# Altium PCB STM32H7.PcbDoc
Units mm, origin at the board's own origin, x right, y up, seen from the top; angles counter-clockwise.
Board outline 71.12 x 61.47 mm, 2 copper layers (Top Layer, Bottom Layer); 67 components, 53 nets, 304 pads, 82 vias.
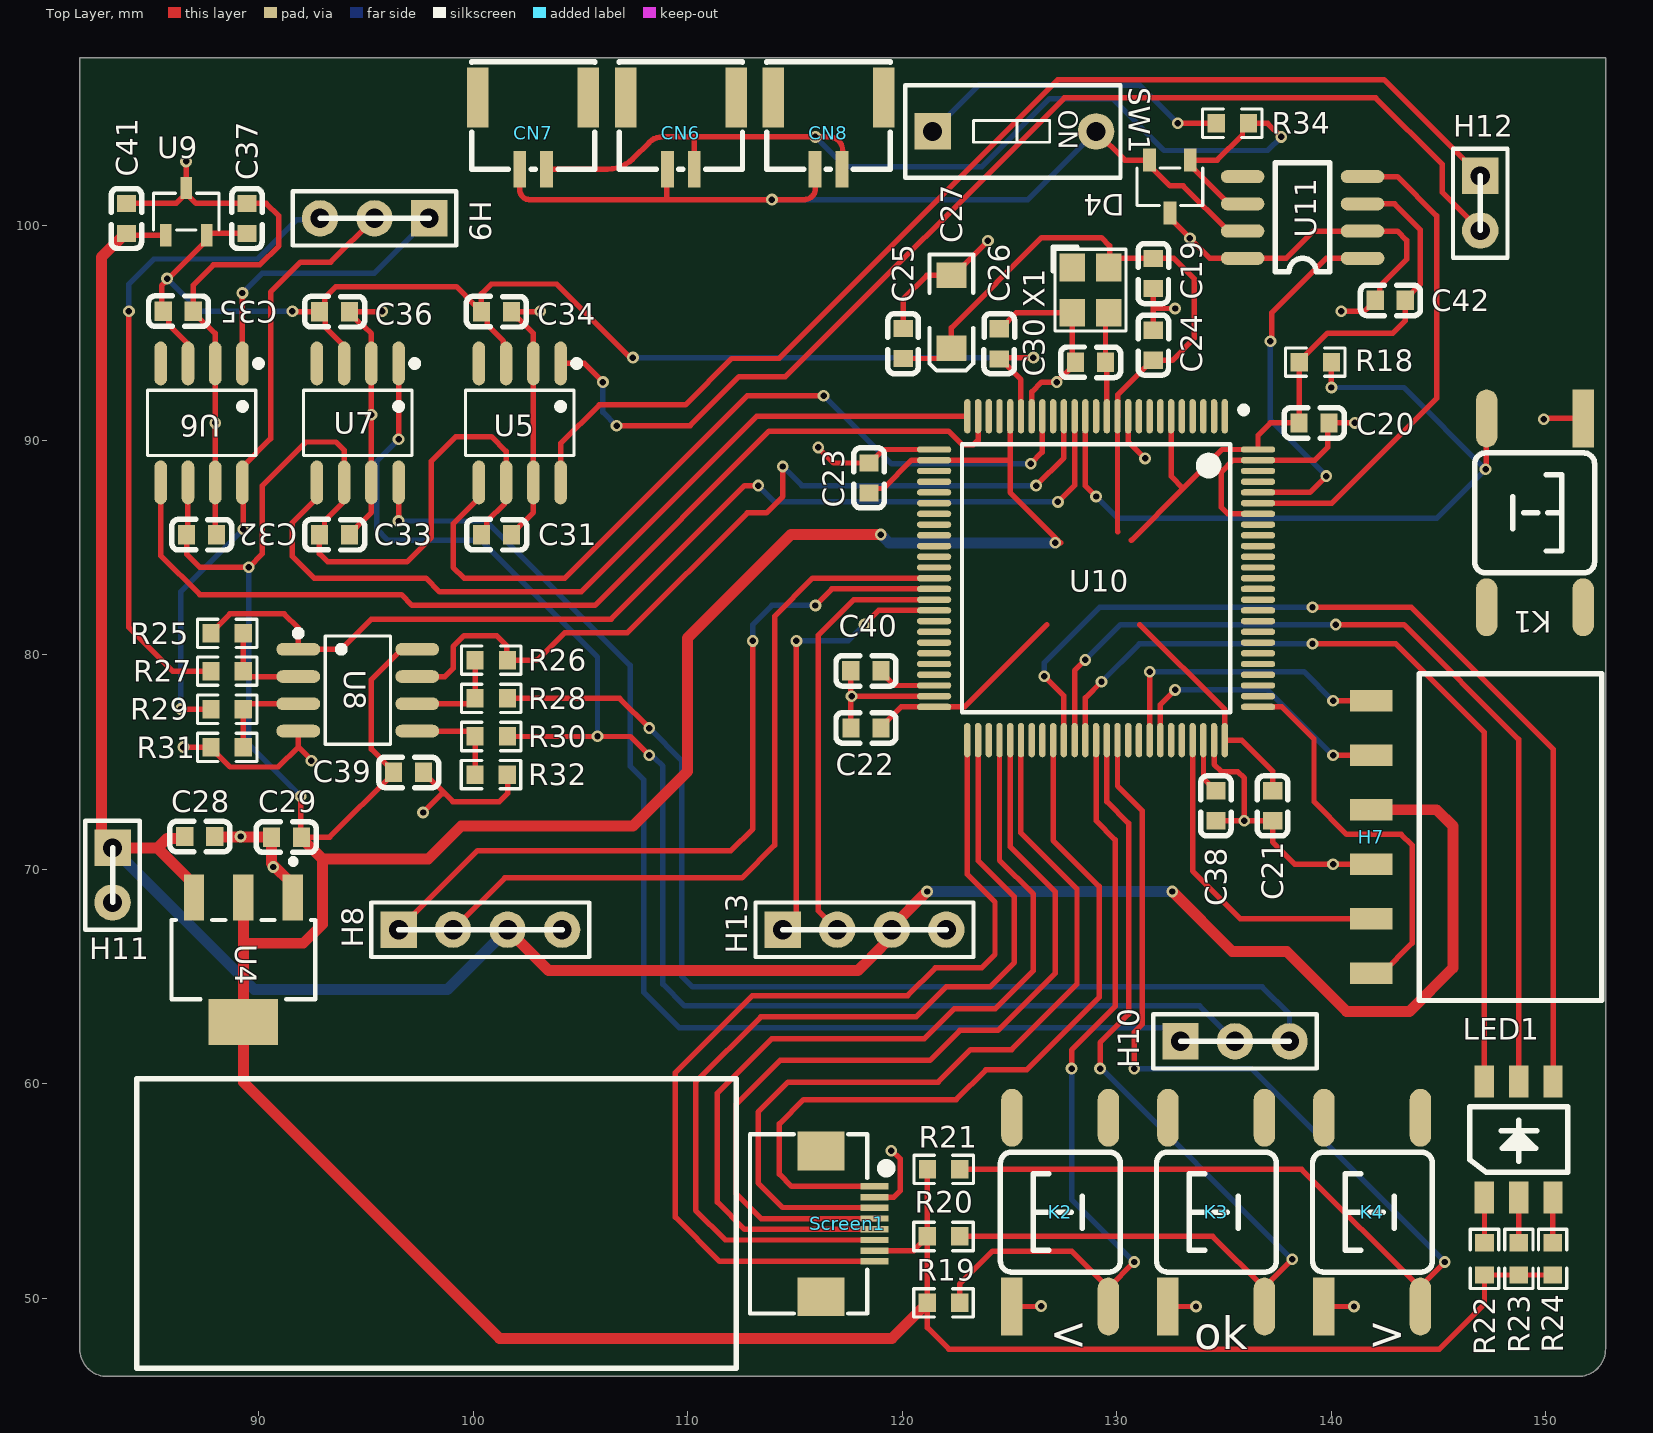
[diagram p0: Top Layer view]
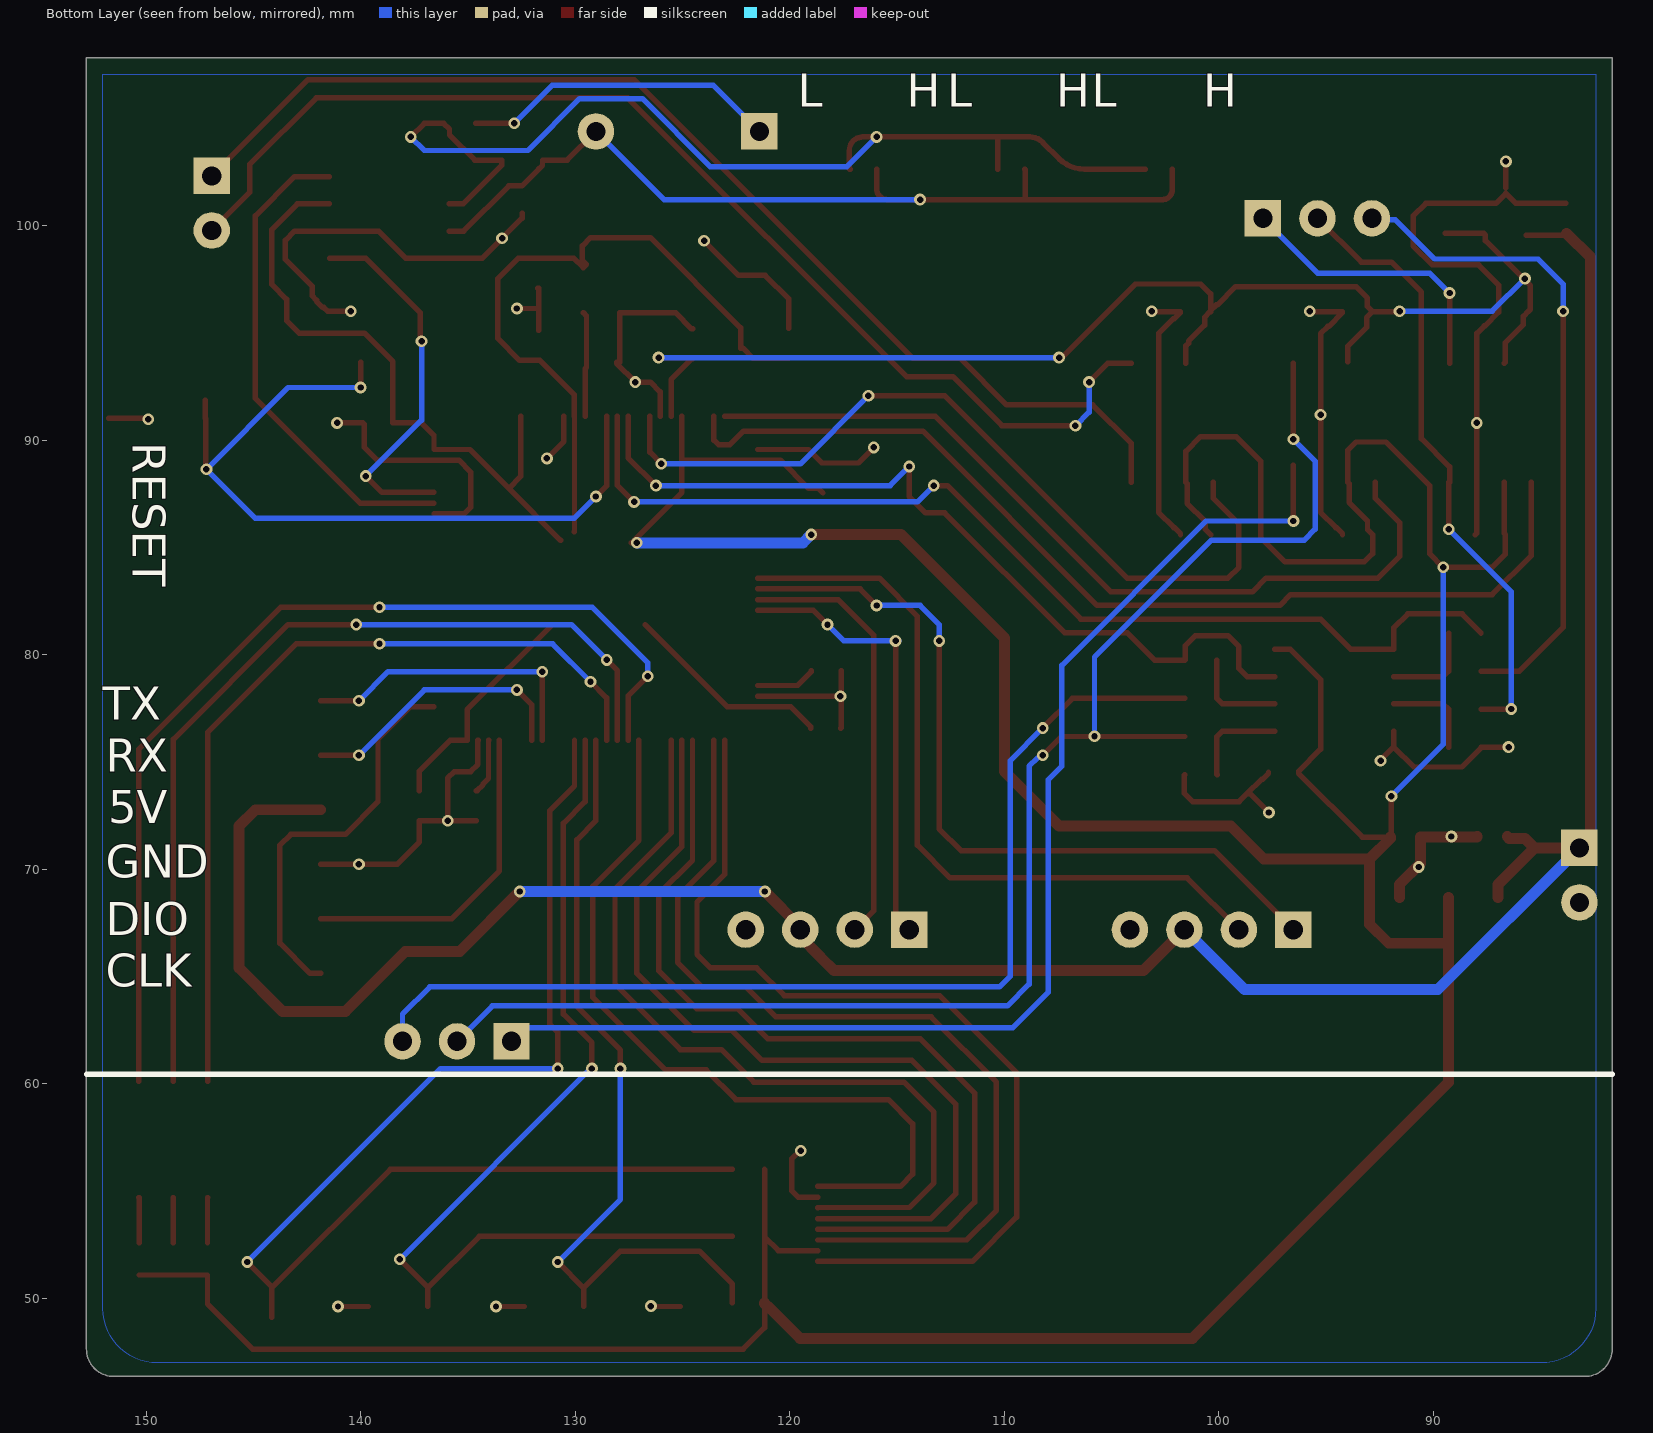
[diagram p1: Bottom Layer view, seen from below]

## Layer stack, top to bottom
Top Solder: solder mask 0.0102, Solder Resist, Dk 3.5
Top Layer: signal copper 0.0356
Dielectric 1: dielectric 0.32, FR-4, Dk 4.8
Bottom Layer: signal copper 0.0356
Bottom Solder: solder mask 0.0102, Solder Resist, Dk 3.5

## Board outline
81.661,47.625 ccw(c82.931,47.625) 82.931,46.355 151.511,46.355 ccw(c151.511,47.625) 152.781,47.625 152.781,107.823 81.661,107.823

## Design rules (kind name [scope] priority, off if disabled: settings)
AssemblyTestPointUsage [All] p0: scope1count=1 scope1_0_kind=Board scope1_0_value=Board scope2count=1 scope2_0_kind=Board scope2_0_value=Board commentlength=0
AssemblyTestpoint [All] p0: scope1count=1 scope1_0_kind=Board scope1_0_value=Board scope2count=1 scope2_0_kind=Board scope2_0_value=Board commentlength=0
Clearance [All] p0: scope1count=1 scope1_0_kind=Board scope1_0_value=Board scope2count=1 scope2_0_kind=Board scope2_0_value=Board commentlength=0 gap=0.3
Clearance [All] p1: gap=0.3 ignorepadtopadclearanceinfootprint=FALSE
ComponentClearance [All] p0: scope1count=1 scope1_0_kind=Board scope1_0_value=Board scope2count=1 scope2_0_kind=Board scope2_0_value=Board commentlength=0 gap=0.254 collisioncheckmode=3
DiffPairsRouting [All] p0: scope1count=1 scope1_0_kind=Board scope1_0_value=Board scope2count=1 scope2_0_kind=Board scope2_0_value=Board commentlength=0
FabricationTestPointUsage [All] p0: scope1count=1 scope1_0_kind=Board scope1_0_value=Board scope2count=1 scope2_0_kind=Board scope2_0_value=Board commentlength=0 valid=0 allowmultiple=FALSE
FabricationTestpoint [All] p0: scope1count=1 scope1_0_kind=Board scope1_0_value=Board scope2count=1 scope2_0_kind=Board scope2_0_value=Board commentlength=0 side=3 testpointundercomponent=TRUE minsize=1.016 maxsize=2.54 preferedsize=1.524 minholesize=0 maxholesize=1.016 preferedholesize=0.813 testpointgrid=0.025
FanoutControl Fanout_BGA [All] p0 off: scope1count=1 scope1_0_kind=Board scope1_0_value=Board scope2count=1 scope2_0_kind=Board scope2_0_value=Board commentlength=69 // Protel DXP Scope 1 Expression Was: IsBGA   Fanout_BGA (Default Rule)
FanoutControl Fanout_LCC [All] p0 off: scope1count=1 scope1_0_kind=Board scope1_0_value=Board scope2count=1 scope2_0_kind=Board scope2_0_value=Board commentlength=69 // Protel DXP Scope 1 Expression Was: IsLCC   Fanout_LCC (Default Rule)
FanoutControl Fanout_SOIC [All] p0 off: scope1count=1 scope1_0_kind=Board scope1_0_value=Board scope2count=1 scope2_0_kind=Board scope2_0_value=Board commentlength=71 // Protel DXP Scope 1 Expression Was: IsSOIC   Fanout_SOIC (Default Rule)
FanoutControl Fanout_Small [All] p0 off: scope1count=1 scope1_0_kind=Board scope1_0_value=Board scope2count=1 scope2_0_kind=Board scope2_0_value=Board commentlength=84 // Protel DXP Scope 1 Expression Was: (CompPinCount < 5)   Fanout_Small (Default Rule)
FanoutControl Fanout_Default [All] p0: scope1count=1 scope1_0_kind=Board scope1_0_value=Board scope2count=1 scope2_0_kind=Board scope2_0_value=Board commentlength=30 // Fanout_Default (Default Rule)
Height [All] p0: scope1count=1 scope1_0_kind=Board scope1_0_value=Board scope2count=1 scope2_0_kind=Board scope2_0_value=Board commentlength=0
HoleSize [All] p0: scope1count=1 scope1_0_kind=Board scope1_0_value=Board scope2count=1 scope2_0_kind=Board scope2_0_value=Board commentlength=0 absolutevalues=TRUE maxlimit=2.54 minlimit=0.025 maxpercent=80.000 minpercent=20.000
HoleToHoleClearance [All] p0: scope1count=1 scope1_0_kind=Board scope1_0_value=Board scope2count=1 scope2_0_kind=Board scope2_0_value=Board commentlength=0
LayerPairs [All] p0: scope1count=1 scope1_0_kind=Board scope1_0_value=Board scope2count=1 scope2_0_kind=Board scope2_0_value=Board commentlength=0 enforce=TRUE
MinimumSolderMaskSliver [All] p0: scope1count=1 scope1_0_kind=Board scope1_0_value=Board scope2count=1 scope2_0_kind=Board scope2_0_value=Board commentlength=0
NetAntennae [All] p0: scope1count=1 scope1_0_kind=Board scope1_0_value=Board scope2count=1 scope2_0_kind=Board scope2_0_value=Board commentlength=0
PasteMaskExpansion [All] p0: scope1count=1 scope1_0_kind=Board scope1_0_value=Board scope2count=1 scope2_0_kind=Board scope2_0_value=Board commentlength=0 expansion=0
PlaneClearance [All] p0: scope1count=1 scope1_0_kind=Board scope1_0_value=Board scope2count=1 scope2_0_kind=Board scope2_0_value=Board commentlength=0 clearance=0.508
PlaneConnect [All] p0: scope1count=1 scope1_0_kind=Board scope1_0_value=Board scope2count=1 scope2_0_kind=Board scope2_0_value=Board commentlength=0 planeconnectstyle=Relief reliefexpansion=0.508 reliefentries=4 reliefconductorwidth=0.254 reliefairgap=0.254
PolygonConnect PolygonConnect_1 [All] p0 off: scope1count=1 scope1_0_kind=Board scope1_0_value=Board scope2count=1 scope2_0_kind=Board scope2_0_value=Board commentlength=70 connectstyle=Direct reliefconductorwidth=0.254 reliefentries=4 polygonreliefangle="90 Angle" // Protel DXP Scope 2 Expression Was: IsNamedPolygon('AGND_L02_P000')
PolygonConnect [All] p0: scope1count=1 scope1_0_kind=Board scope1_0_value=Board scope2count=1 scope2_0_kind=Board scope2_0_value=Board commentlength=0 connectstyle=Relief reliefconductorwidth=0.254 reliefentries=4 polygonreliefangle="90 Angle"
PolygonConnect PolygonConnect_1 [All vs IsNamedPolygon('AGND_L02_P000')] p1: connectstyle=Direct reliefconductorwidth=0.254 reliefentries=4 polygonreliefangle="90 Angle" airgapwidth=0.254
PolygonConnect [All] p2: connectstyle=Relief reliefconductorwidth=0.254 reliefentries=4 polygonreliefangle="90 Angle" airgapwidth=0.254
RoutingCorners [All] p0: scope1count=1 scope1_0_kind=Board scope1_0_value=Board scope2count=1 scope2_0_kind=Board scope2_0_value=Board commentlength=0 cornerstyle=45-Degree minsetback=2.54 maxsetback=2.54
RoutingLayers [All] p0: scope1count=1 scope1_0_kind=Board scope1_0_value=Board scope2count=1 scope2_0_kind=Board scope2_0_value=Board commentlength=0 top layer=Automatic bottom layer=Automatic
RoutingPriority [All] p0: scope1count=1 scope1_0_kind=Board scope1_0_value=Board scope2count=1 scope2_0_kind=Board scope2_0_value=Board commentlength=0
RoutingTopology [All] p0: scope1count=1 scope1_0_kind=Board scope1_0_value=Board scope2count=1 scope2_0_kind=Board scope2_0_value=Board commentlength=0 topology=Shortest
RoutingVias [All] p0: scope1count=1 scope1_0_kind=Board scope1_0_value=Board scope2count=1 scope2_0_kind=Board scope2_0_value=Board commentlength=0 holewidth=0.711 width=1.27 viastyle="Through Hole" minholewidth=0.711 minwidth=1.27 maxholewidth=0.711 maxwidth=1.27
RoutingVias [All] p1: holewidth=0.711 width=1.27 viastyle="Through Hole" minholewidth=0.711 minwidth=1.27 maxholewidth=0.711 maxwidth=1.27
ShortCircuit [All] p0: scope1count=1 scope1_0_kind=Board scope1_0_value=Board scope2count=1 scope2_0_kind=Board scope2_0_value=Board commentlength=0 allowed=FALSE
SilkToBoardRegionClearance [All] p0: scope1count=1 scope1_0_kind=Board scope1_0_value=Board scope2count=1 scope2_0_kind=Board scope2_0_value=Board commentlength=0
SilkToSilkClearance [All] p0: scope1count=1 scope1_0_kind=Board scope1_0_value=Board scope2count=1 scope2_0_kind=Board scope2_0_value=Board commentlength=0
SilkToSolderMaskClearance [All] p0 off: scope1count=1 scope1_0_kind=Board scope1_0_value=Board scope2count=1 scope2_0_kind=Board scope2_0_value=Board commentlength=44 // Protel DXP Scope 1 Expression Was: IsPad
SolderMaskExpansion [All] p0: scope1count=1 scope1_0_kind=Board scope1_0_value=Board scope2count=1 scope2_0_kind=Board scope2_0_value=Board commentlength=0 expansion=0.102
SolderMaskExpansion [All] p1: expansion=0.102 istentingtop=FALSE
UnRoutedNet [All] p0: scope1count=1 scope1_0_kind=Board scope1_0_value=Board scope2count=1 scope2_0_kind=Board scope2_0_value=Board commentlength=0
UnpouredPolygon [All] p0: scope1count=1 scope1_0_kind=Board scope1_0_value=Board scope2count=1 scope2_0_kind=Board scope2_0_value=Board commentlength=0
Width [All] p0: scope1count=1 scope1_0_kind=Board scope1_0_value=Board scope2count=1 scope2_0_kind=Board scope2_0_value=Board commentlength=0 maxlimit=0.508 minlimit=0.254 preferedwidth=0.254
Width [All] p1: maxlimit=0.508 minlimit=0.254 preferedwidth=0.254
30 further rules are at their usual default settings.

## Components (designator, comment, footprint, x,y, rotation, side; value= is the part's Value field where it differs from the comment)
C19 "100nF" C0603 131.704,97.775 r90 top
C20 "100nF" C0603 139.192,90.805 r180 top
C21 "100nF" C0603 137.262,72.96 r90 top
C22 "100nF" C0603 118.315,76.582 r0 top
C23 "100nF" C0603 118.447,88.238 r270 top
C24 "100nF" C0603 131.699,94.426 r270 top
C25 "100nF" C0603 120.039,94.508 r90 top
C26 "100nF" C0603 124.516,94.492 r270 top
C27 "10uF" "CD A(3216)" 122.285,95.988 r90 top
C28 "1uF" C0603 87.248,71.526 r180 top
C29 "1uF" C0603 91.292,71.494 r0 top
C30 "15pF" C0603 128.772,93.636 r180 top
C31 "100nF" C0603 101.081,85.598 r180 top
C32 "100nF" C0603 87.334,85.598 r180 top
C33 "100nF" C0603 93.53,85.598 r180 top
C34 "100nF" C0603 101.081,95.988 r0 top
C35 "100nF" C0603 86.249,96.017 r180 top
C36 "100nF" C0603 93.53,95.994 r180 top
C37 "100nF" C0603 89.449,100.342 r90 top
C38 "2.2uF" C0603 134.62,72.96 r90 top
C39 "470nF" C0603 96.979,74.516 r180 top
C40 "2.2uF" C0603 118.299,79.248 r180 top
C41 "470nF" C0603 83.832,100.342 r90 top
C42 "100nF" C0603 142.748,96.52 r180 top
CN6 "A1257WR-S-2P" CONN-SMD_A1257WR-S-2P 109.676,104.308 r180 top
CN7 "A1257WR-S-2P" CONN-SMD_A1257WR-S-2P 102.794,104.308 r180 top
CN8 "A1257WR-S-2P" CONN-SMD_A1257WR-S-2P 116.557,104.308 r180 top
D4 "PESD1CAN" SOT-23-3_L2.9-W1.6-P1.90-LS2.8-BR 132.474,101.817 r90 top
H7 "6P卧贴排母" HDR-SMD_6P-P2.54-H-F-L11.5 141.859,71.501 r90 top
H8 "Header-Female-2.54_1x4" HDR2.54-M-LI-4P 100.33,67.183 r0 top locked
H9 "Header-Female-2.54_1x3" HDR2.54-M-LI-3P 95.397,100.342 r180 top locked
H10 "Header-Female-2.54_1x3" HDR2.54-M-LI-3P 135.509,61.976 r0 top locked
H11 "Header-Female-2.54_1x2" HDR2.54-M-LI-2P 83.185,69.723 r270 top locked
H12 "Header-Female-2.54_1x2" HDR2.54-M-LI-2P 146.943,101.049 r270 top locked
H13 "Header-Female-2.54_1x4" HDR2.54-M-LI-4P 118.237,67.183 r0 top locked
K1 "TSW SMD-6*6*5" "TSW SMD-6*6*5" 149.479,86.614 r270 top
K2 "TSW SMD-6*6*5" "TSW SMD-6*6*5" 127.37,54.017 r90 top locked
K3 "TSW SMD-6*6*5" "TSW SMD-6*6*5" 134.643,54.017 r90 top locked
K4 "TSW SMD-6*6*5" "TSW SMD-6*6*5" 141.916,54.017 r90 top locked
LED1 "LED 5050" "LED 5050" 148.735,57.402 r90 top locked
R18 "10k" R0603 139.253,93.636 r180 top
R19 "10k" R0603 121.92,49.784 r180 top
R20 "10k" R0603 121.92,52.881 r180 top
R21 "10k" R0603 121.929,56.007 r180 top
R22 "330 ohm" R0603 147.141,51.838 r270 top locked
R23 "510 ohm" R0603 148.739,51.838 r270 top locked
R24 "330 ohm" R0603 150.316,51.838 r270 top locked
R25 "3.3k" R0603 88.528,80.995 r180 top
R26 "3.3k" R0603 100.838,79.745 r0 top
R27 "75k" R0603 88.528,79.237 r0 top
R28 "75k" R0603 100.838,77.967 r0 top
R29 "75k" R0603 88.528,77.459 r0 top
R30 "75k" R0603 100.838,76.189 r0 top
R31 "3.3k" R0603 88.528,75.681 r0 top
R32 "3.3k" R0603 100.829,74.411 r180 top
R34 "120 ohm" R0603 135.382,104.775 r0 top
Screen1 "FPC1.0-8P" "FPC0.5 2H-S-W-8P" 116.205,53.467 r270 top locked
SW1 "DIP-Red-1P" "CSW DIP-1P_G" 125.222,104.394 r270 top
U4 "TLV1117-33IDCYR" FP-DCY0004A-MFG 89.281,65.786 r270 top
U5 "CSA240LCSOIC8" SOIC-8_L4.9-W3.9-P1.27-LS6.0-BL 102.167,90.805 r180 top
U6 "CSA240LCSOIC8" SOIC-8_L4.9-W3.9-P1.27-LS6.0-BL 87.334,90.805 r180 top
U7 "CSA240LCSOIC8" SOIC-8_L4.9-W3.9-P1.27-LS6.0-BL 94.615,90.805 r180 top
U8 "GS8552-SR" SOIC-8_L4.9-W3.9-P1.27-LS6.0-BL 94.615,78.348 r270 top
U9 "REF3033AIDBZR" SOT-23-3_L3.0-W1.7-P0.95-LS2.9-BR 86.617,100.66 r270 top
U10 "STM32H743VIT6" LQFP-100_L14.0-W14.0-P0.50-LS16.0-BL 129.032,83.566 r180 top
U11 "SN65HVD230DR" SOP-8 141.428,98.454 r180 top
X1 "25Mhz" "OSC 3225-4P" 128.772,96.993 r270 top

## Footprints (in the part's own frame and the unit in brackets; to place one, negate y for a bottom-side part, rotate by r counter-clockwise, add the part's x,y. Pads: shape width x height; smd on the part's side, far side on the other; paste and mask are expansions set on the pad)
C0603 [mm]
  rect 0.8x0.9 smd: 1(-0.7,0) 2(0.7,0)
  silkscreen extent -1.41,-0.71 1.39,0.72
"CD A(3216)" [mm] "长3.2mm，宽1.6mm，厚1.6mm"
  rect 1.2x1.4 smd: 1(-1.7,0) 2(1.7,0)
  silkscreen extent -2.74,-1.02 2.67,1.02
CONN-SMD_A1257WR-S-2P [mm]
  rect 0.6x1.7 smd: 1(0.625,1.675) 2(-0.625,1.675)
  rect 1x2.8 smd: 3(2.575,-1.675) 4(-2.575,-1.675)
  silkscreen extent -2.87,-3.33 2.87,1.68
"CSW DIP-1P_G" [mm] "4.1*9.9*7mm"
  rect 1.7x1.7 hole 0.9: 1(0,-3.81)
  round 1.7 hole 0.9: 2(0,3.81)
  silkscreen extent -2.16,-5.08 2.16,4.95
FP-DCY0004A-MFG [mm]
  rect 2.15x0.95 smd paste+0 mask+0: 1(-2.9,2.3) 2(-2.9,0) 3(-2.9,-2.3)
  rect 2.15x3.25 smd paste+0 mask+0: 4(2.9,0)
  silkscreen extent -4.7,-3.35 1.85,3.35
"FPC0.5 2H-S-W-8P" [mm] "长：8.2mm，宽：5.2mm，高：2mm"
  rect 1.8x2.2 smd: 0(-3.4,0) 0(3.4,0)
  rect 0.3x1.3 smd: 1(-1.75,2.497) 2(-1.25,2.497) 3(-0.75,2.497) 4(-0.25,2.497) 5(0.25,2.497) 6(0.75,2.497) 7(1.25,2.497) 8(1.75,2.497)
  silkscreen extent -4.17,-3.3 4.17,3.23
HDR2.54-M-LI-2P [mm] "排母，2脚"
  rect 1.7x1.7 hole 0.9: 1(-1.27,0)
  round 1.7 hole 0.9: 2(1.27,0)
  silkscreen extent -2.54,-1.27 2.54,1.27
HDR2.54-M-LI-3P [mm] "排母，3脚"
  rect 1.7x1.7 hole 0.9: 1(-2.54,0)
  round 1.7 hole 0.9: 2(0,0) 3(2.54,0)
  silkscreen extent -3.81,-1.27 3.81,1.27
HDR2.54-M-LI-4P [mm] "排母，4脚"
  rect 1.7x1.7 hole 0.9: 1(-3.81,0)
  round 1.7 hole 0.9: 2(-1.27,0) 3(1.27,0) 4(3.81,0)
  silkscreen extent -5.08,-1.27 5.08,1.27
HDR-SMD_6P-P2.54-H-F-L11.5 [mm]
  rect 1x2 smd paste+0 mask+0: 1(-6.35,0) 2(-3.81,0) 3(-1.27,0) 4(1.27,0) 5(3.81,0) 6(6.35,0)
  silkscreen extent -7.62,-10.75 7.62,-2.25
"LED 5050" [mm] "白色5050LED"
  rect 1.5x0.9 smd: 1(2.705,1.6) 2(-2.705,1.6) 3(2.705,0) 4(-2.705,0) 5(2.705,-1.6) 6(-2.705,-1.6)
  silkscreen extent -1.52,-2.29 1.52,2.29
LQFP-100_L14.0-W14.0-P0.50-LS16.0-BL [mm]
  oval 0.3x1.6 smd paste-100 mask+0: 1(-6,-7.55) 2(-5.5,-7.55) 3(-5,-7.55) 4(-4.5,-7.55) 5(-4,-7.55) 6(-3.5,-7.55) 7(-3,-7.55) 8(-2.5,-7.55) 9(-2,-7.55) 10(-1.5,-7.55) 11(-1,-7.55) 12(-0.5,-7.55) 13(0,-7.55) 14(0.5,-7.55) 15(1,-7.55) 16(1.5,-7.55) 17(2,-7.55) 18(2.5,-7.55) 19(3,-7.55) 20(3.5,-7.55) 21(4,-7.55) 22(4.5,-7.55) 23(5,-7.55) 24(5.5,-7.55) 25(6,-7.55) 51(6,7.55) 52(5.5,7.55) 53(5,7.55) 54(4.5,7.55) 55(4,7.55) 56(3.5,7.55) 57(3,7.55) 58(2.5,7.55) 59(2,7.55) 60(1.5,7.55) 61(1,7.55) 62(0.5,7.55) 63(0,7.55) 64(-0.5,7.55) 65(-1,7.55) 66(-1.5,7.55) 67(-2,7.55) 68(-2.5,7.55) 69(-3,7.55) 70(-3.5,7.55) 71(-4,7.55) 72(-4.5,7.55) 73(-5,7.55) 74(-5.5,7.55) 75(-6,7.55)
  oval 1.6x0.3 smd paste-100 mask+0: 26(7.55,-6) 27(7.55,-5.5) 28(7.55,-5) 29(7.55,-4.5) 30(7.55,-4) 31(7.55,-3.5) 32(7.55,-3) 33(7.55,-2.5) 34(7.55,-2) 35(7.55,-1.5) 36(7.55,-1) 37(7.55,-0.5) 38(7.55,0) 39(7.55,0.5) 40(7.55,1) 41(7.55,1.5) 42(7.55,2) 43(7.55,2.5) 44(7.55,3) 45(7.55,3.5) 46(7.55,4) 47(7.55,4.5) 48(7.55,5) 49(7.55,5.5) 50(7.55,6) 76(-7.55,6) 77(-7.55,5.5) 78(-7.55,5) 79(-7.55,4.5) 80(-7.55,4) 81(-7.55,3.5) 82(-7.55,3) 83(-7.55,2.5) 84(-7.55,2) 85(-7.55,1.5) 86(-7.55,1) 87(-7.55,0.5) 88(-7.55,0) 89(-7.55,-0.5) 90(-7.55,-1) 91(-7.55,-1.5) 92(-7.55,-2) 93(-7.55,-2.5) 94(-7.55,-3) 95(-7.55,-3.5) 96(-7.55,-4) 97(-7.55,-4.5) 98(-7.55,-5) 99(-7.55,-5.5) 100(-7.55,-6)
  silkscreen extent -7.03,-8 6.25,6.25
"OSC 3225-4P" [mm] "3.2*2.5*0.7mm(长宽高)"
  rect 1.3x1.2 smd: 1(-1.05,-0.85) 2(1.05,-0.85) 3(1.05,0.85) 4(-1.05,0.85)
  silkscreen extent -2.03,-1.75 1.91,1.65
R0603 [mm]
  rect 0.806x0.864 smd: 1(-0.753,0) 2(0.753,0)
  silkscreen extent -1.39,-0.66 1.39,0.66
SOIC-8_L4.9-W3.9-P1.27-LS6.0-BL [mm]
  oval 0.588x2.045 smd: 1(-1.905,-2.772) 2(-0.635,-2.772) 3(0.635,-2.772) 4(1.905,-2.772) 5(1.905,2.772) 6(0.635,2.772) 7(-0.635,2.772) 8(-1.905,2.772)
  silkscreen extent -2.8,-2.92 2.53,1.52
SOP-8 [mil] "（蒜米工坊）"
  oval 80x24 smd: 1(-1,-1) 2(-1,-51) 3(-1,-101) 4(-1,-151) 5(219,-151) 6(219,-101) 7(219,-51) 8(219,-1)
  silkscreen extent 59,-176 159,24
SOT-23-3_L2.9-W1.6-P1.90-LS2.8-BR [mm]
  rect 1.07x0.6 smd: 1(1.235,-0.95) 2(1.235,0.95) 3(-1.235,0)
  silkscreen extent -0.88,-1.54 0.88,1.54
SOT-23-3_L3.0-W1.7-P0.95-LS2.9-BR [mm]
  rect 1.037x0.532 smd: 1(1.101,-0.95) 2(1.101,0.95) 3(-1.101,0)
  silkscreen extent -0.86,-1.53 0.86,1.53
"TSW SMD-6*6*5" [mm] "6*6*5mm"
  rect 2.7x1 smd: 1(-4.4,2.261)
  oval 2.7x1 smd: 2(4.4,2.261) 3(-4.4,-2.239) 4(4.4,-2.239)
  silkscreen extent -2.79,-2.79 2.79,2.79

## Part data
C19 C20 C21 C22 C23 C24 C25 C26 C28 C29 C30 C31 C32 C33 C34 C35 C36 C37 C38 C39 C40 C41 C42: library part C0603
C27: library part A型钽电容, "长3.2mm，宽1.6mm，厚1.6mm"
LED1: "5050RGB-LED"
R18 R19 R20 R21 R22 R23 R24 R25 R26 R27 R28 R29 R30 R31 R32 R34: library part R0603
Screen1: library part FPC-8P-0.5, "FPC连接器"
U4: library part CMP-04917-000056-1, "IC REG LIN 3.3V 800MA SOT223-4"
U5 U6 U7: "低噪声低温漂双向电流高端检测芯片"
U8: "1.5MHZ, 轨到轨高精双通道运放"
U9: "3.3V基准电压源"
U10: "STM32H7"
U11: "常用CAN收发器"
X1: library part OSC-3225

## Via types
v1: diameter 0.55, hole 0.3, Top Layer to Bottom Layer, 82 vias

## Nets (pads, with @x,y where several pads share a name; then routed paths per layer and width w, separated by ;. In a path a pad name is that pad's centre, name@x,y a point inside that pad or via, vN(x,y) a via of type N, cw(c..) or ccw(c..) an arc to the next point about the centre after c; other vN are vias at no path point)
+3V3: C19.2 C20.2 C21.2 C22.2 C23.2 C24.2 C25.1 C27.1 C29.2 C31.2 C32.2 C33.2 C39.2 C42.1 R18.2 R19.2 R20.2 R21.2 R22.2 R23.2 R24.2 Screen1.7 U4.2 U4.4 U5.6 U6.6 U7.6 U8.8 U10.6 U10.11 U10.21 U10.27 U10.50 U10.75 U10.100 U11.3 X1.4 | length 303.4
  Top Layer w0.254: U6.6 86.699,85.663 C32.2 86.634,84.689 87.249,84.074 v1(89.535,84.074) 90.17,84.709 90.17,87.884 92.202,89.916 93.599,89.916 93.98,89.535 U7.6 93.916,87.969 93.916,87.098 93.063,86.245 93.063,85.832 C33.2 92.83,84.716 93.218,84.328 96.901,84.328 98.044,85.471 98.044,89.027 99.187,90.17 100.838,90.17 101.532,89.476 U5.6 101.468,87.969 101.468,87.058 100.635,86.225 100.635,85.852 C31.2 ; v1(91.948,73.406) 91.948,71.537 C29.2 93.306,71.494 96.279,74.466 C39.2 96.279,74.566 95.25,75.596 95.25,78.844 96.659,80.253 U8.8 ; C23.2 118.658,87.748 119.117,87.748 120.435,89.066 U10.27 124.993,89.066 125.032,89.027 ; Screen1.7 120.531,52.217 R20.2@121.167,52.853 ; C22.2 119.014,76.632 119.948,77.566 U10.50 122.905,77.566 126.746,81.407 ; C25.1 121.704,93.808 122.185,94.288 C27.1 122.285,95.234 126.492,99.441 129.286,99.441 129.667,99.06 129.667,98.388 129.472,98.193 X1.4 130.054,98.475 C19.2 132.665,98.475 133.604,97.536 133.604,94.742 132.588,93.726 C24.2 131.649,93.726 130.041,92.118 130.041,91.125 U10.11 130.032,85.741 130.048,85.725 ; R19.2@121.167,49.755 121.167,48.632 122.174,47.625 145.034,47.625 147.141,49.732 R22.2 R23.2 R24.2 ; R19.2 R20.2@121.167,52.853 ; R21.2 121.167,55.998 R20.2 R20.2@121.167,52.853 ; U10.21 125.032,89.027 ; v1@127.381,85.217 125.032,87.566 125.032,89.027 ; 130.674,85.335 133.096,87.757 ; 131.064,81.407 135.032,77.439 U10.75 135.82,76.016 137.262,74.574 C21.2 ; U10.6 132.541,91.107 132.541,88.312 133.096,87.757 ; C20.2 137.16,90.805 136.582,90.227 U10.100 134.905,89.566 133.096,87.757 ; C20.2@138.5,90.805 R18.2 138.5,93.665 139.831,94.996 142.875,94.996 143.448,95.569 C42.1 143.448,96.57 144.145,97.267 144.145,99.822 142.947,101.02 U11.3
  Top Layer w0.508: U4.2 89.281,66.675 ; C29.2 91.991,71.444 92.964,70.471 ; v1(118.999,85.598) 114.808,85.598 109.982,80.772 109.982,74.549 107.442,72.009 99.441,72.009 97.903,70.471 92.964,70.471 ; R19.2 121.167,49.755 121.018,49.606 120.989,49.606 119.516,48.133 101.219,48.133 89.281,60.071 U4.4 89.281,66.675 ; 89.281,66.675 89.408,66.548 92.075,66.548 92.964,67.437 92.964,70.471
  Bottom Layer w0.254: v1(89.535,84.074) 89.535,75.819 v1(91.948,73.406)
  Bottom Layer w0.508: v1(118.999,85.598) 119.38,85.217 v1(127.127,85.217)
+5: C28.2 C41.1 H7.4 H8.3 H11.1 H13.3 U4.3 U9.1 | length 120.6
  Top Layer w0.254: C41.1@83.782,99.642 C41.1 ; C41.1@83.915,99.559 U9.1
  Top Layer w0.508: C41.1@83.782,99.642 82.677,98.538 82.677,71.501 H11.1 85.274,70.993 ; C28.2 86.463,71.441 85.722,71.441 85.274,70.993 ; U4.3 86.981,69.286 85.274,70.993 ; H8.3 103.505,65.278 117.939,65.278 118.561,65.899 118.561,65.914 119.507,66.86 H13.3 119.507,67.31 v1(121.158,68.961) ; v1(132.588,68.961) 135.382,66.167 137.922,66.167 140.716,63.373 143.637,63.373 145.669,65.405 145.669,72.009 144.907,72.771 H7.4
  Bottom Layer w0.508: H11.1 89.789,64.389 98.806,64.389 H8.3 ; v1(121.158,68.961) v1(132.588,68.961)
ADC_Iin: U6.5 U10.24 | length 47.3
  Top Layer w0.254: U6.5 85.429,84.624 87.249,82.804 96.647,82.804 97.155,82.296 105.664,82.296 113.792,90.424 122.147,90.424 122.782,89.789 123.317,89.789 123.532,90.004 U10.24
ADC_IL: U5.5 U10.18 | length 38.9
  Top Layer w0.254: U5.5 100.262,87.304 99.06,86.102 99.06,84.074 99.568,83.566 104.267,83.566 112.776,92.075 v1(116.332,92.075) ; v1(125.984,88.9) 126.523,89.439 126.523,91.107 U10.18
  Bottom Layer w0.254: v1(116.332,92.075) 119.507,88.9 v1(125.984,88.9)
ADC_Iout: U7.5 U10.25 | length 39.5
  Top Layer w0.254: U7.5 92.71,87.304 91.567,86.161 91.567,84.582 92.583,83.566 97.79,83.566 98.425,82.931 105.029,82.931 113.214,91.116 U10.25
ADC_Vin: R25.2 U8.1 U10.15 | length 48.9
  Top Layer w0.254: R25.2 87.775,81.023 88.655,81.904 91.186,81.904 91.843,81.247 U8.1 93.842,80.253 95.25,81.661 106.426,81.661 112.649,87.884 v1(113.284,87.884) ; v1(127.254,87.122) 128.032,87.9 U10.15
  Bottom Layer w0.254: v1(113.284,87.884) 114.046,87.122 v1(127.254,87.122)
ADC_Vout: R26.2 U8.7 U10.16 | length 39.8
  Top Layer w0.254: U8.7 98.679,78.983 99.06,79.364 99.06,80.38 99.568,80.888 101.092,80.888 101.571,80.409 101.571,79.765 R26.2 102.986,79.745 104.267,81.026 107.188,81.026 112.776,86.614 113.665,86.614 114.427,87.376 v1(114.427,88.773) ; v1(126.238,87.884) 127.532,89.178 U10.16
  Bottom Layer w0.254: v1(114.427,88.773) 115.316,87.884 v1(126.238,87.884)
AGND: C19.1 C20.1 C21.1 C22.1 C23.1 C24.1 C25.2 C26.1 C27.2 C28.1 C29.1 C30.2 C31.1 C32.1 C33.1 C34.2 C35.1 C36.1 C37.2 C38.1 C39.1 C40.2 C41.2 C42.2 D4.3 H7.3 H8.4 H11.2 H13.4 K1.1 K2.1 K3.1 K4.1 R31.1 R32.1 Screen1.2 U4.1 U5.2 U5.7 U6.2 U6.7 U7.2 U7.7 U8.4 U9.3 U10.10 U10.19 U10.26 U10.49 U10.74 U10.94 U10.99 U11.2 U11.8 X1.2 | length 159.6
  Top Layer w0.254: C41.2 86.151,101.042 86.617,101.508 87.084,101.042 C37.2 90.347,101.042 90.932,100.457 90.932,99.06 90.043,98.171 87.884,98.171 86.949,97.236 C35.1 86.949,95.967 87.581,95.335 87.615,95.335 87.969,94.981 U6.2 U6.7 87.969,85.663 C32.1 ; v1(86.487,75.692) 87.763,75.692 R31.1 87.775,75.652 88.661,74.765 90.905,74.765 91.843,75.702 ; v1(86.614,102.997) 86.617,102.994 U9.3 ; U8.4 91.843,75.702 ; v1(92.456,75.057) 92.456,75.089 91.843,75.702 ; C33.1 94.23,85.648 94.503,85.921 94.542,85.921 95.25,86.629 U7.7 ; U7.7@95.25,88.109 U7.2 95.25,94.973 94.912,95.312 94.862,95.312 94.23,95.944 C36.1 95.74,95.994 v1(95.758,96.012) ; v1(97.663,72.644) 98.544,73.525 98.671,73.525 ; C39.1 97.679,74.466 97.952,74.193 98.002,74.193 98.671,73.525 ; R32.1 101.6,74.393 101.6,73.533 101.219,73.152 99.043,73.152 98.671,73.525 ; C31.1 101.781,85.648 102.054,85.921 102.094,85.921 102.802,86.629 U5.7 U5.2 102.802,94.981 102.117,95.665 102.07,95.665 101.797,95.938 C34.2@101.797,95.988 ; C34.2 C34.2@101.797,95.988 ; v1(103.124,96.012) 103.1,95.988 C34.2@101.797,95.988 ; v1(116.078,89.662) 116.802,88.938 C23.1 118.497,88.938 119.125,89.566 U10.26 ; C40.2 v1@117.599,78.105 ; C22.1 117.599,76.598 v1@117.599,78.105 ; Screen1.2 119.614,54.717 119.91,55.013 119.91,56.493 v1@119.507,56.896 ; C25.2 120.039,96.586 121.141,97.688 C27.2 122.385,97.688 124.011,99.314 v1@124.079,99.314 ; U10.49 v1(117.638,78.066) v1@117.599,78.105 ; C26.1@124.532,95.208 C26.1 124.566,95.192 125.317,95.943 X1.2 C30.2@127.922,93.636 ; K2.1 126.452,49.617 v1@126.492,49.657 ; U10.19 126.041,91.125 126.041,92.259 126.492,92.71 v1(127.196,92.71) 128.072,93.586 C30.2 ; U10.10 130.532,89.94 v1(131.318,89.154) ; C24.1 131.704,95.131 131.704,96.103 ; C19.1@131.754,97.075 C19.1 131.704,96.103 ; K3.1 v1(133.691,49.617) v1@133.731,49.657 ; D4.3 132.474,100.347 134.342,98.48 U11.8 137.897,98.48 139.167,99.75 U11.2 143.074,99.75 143.51,99.314 143.51,98.425 142.267,97.182 142.267,96.739 C42.2 142.048,96.47 141.775,96.197 141.725,96.197 141.54,96.012 v1(140.462,96.012) ; v1(132.715,96.139) 131.74,96.139 131.704,96.103 ; U10.74@134.525,76.009 U10.74 134.532,74.891 134.874,74.549 135.636,74.549 135.941,74.244 v1(135.941,72.26) ; C38.1 v1(135.941,72.26) ; U10.94 135.176,86.566 134.874,86.868 134.874,88.519 135.421,89.066 U10.99 139.231,89.066 139.837,89.672 139.837,90.75 C20.1 v1(141.097,90.805) ; K4.1 v1(141.057,49.617) v1@141.097,49.657 ; H7.3 138.303,70.231 137.262,71.272 C21.1 v1(135.941,72.26) ; v1@149.86,90.932 149.942,91.014 K1.1
  Top Layer w0.508: C28.1 87.964,71.51 90.576,71.51 C29.1 90.592,70.275 91.581,69.286 U4.1
  other v1: 126.472,49.637 119.487,56.876 90.678,70.104 140.081,70.231 89.152,71.525 87.969,90.805 149.901,90.973 95.25,91.186 123.99,99.294 133.408,99.413
CAN_RX: U10.95 U11.4 | length 23.1
  Top Layer w0.254: U10.95 140.025,87.066 144.907,91.948 144.907,100.457 143.074,102.29 U11.4
CAN_TX: U10.96 U11.1 | length 17.5
  Top Layer w0.254: U10.96 139.001,87.566 v1(139.763,88.328) ; v1(137.16,94.615) 137.217,94.672 137.217,95.942 139.755,98.48 U11.1
  Bottom Layer w0.254: v1(137.16,94.615) 137.16,90.932 v1(139.763,88.328)
CANH: CN6.1 CN7.1 CN8.1 D4.2 SW1.2 U11.7 | length 43
  Top Layer w0.254: CN7.1 102.169,101.666 ccw(c102.616,101.666) 102.616,101.219 109.029,101.219 ; CN6.1 ccw(c109.051,102.612) 109.029,102.612 109.029,101.219 ; CN8.1 cw(c115.932,102.614) 115.951,102.614 115.951,101.727 cw(c115.443,101.727) 115.443,101.219 109.029,101.219 ; SW1.2 130.374,103.052 D4.2 131.524,102.817 131.697,102.644 132.488,101.854 133.096,101.854 135.2,99.75 U11.7
  Bottom Layer w0.254: v1(113.919,101.219) 125.857,101.219 SW1.2
CANL: CN6.2 CN7.2 CN8.2 D4.1 R34.2 U11.6 | length 50.8
  Top Layer w0.254: CN7.2 106.256,102.633 ccw(c106.256,104.31) 107.442,103.124 108.204,103.886 cw(c108.817,103.273) 108.817,104.14 ; 108.818,104.14 110.236,104.14 ; CN6.2 110.301,104.075 ccw(c110.236,104.075) 110.236,104.14 ; CN8.2 ccw(c117.182,102.671) 117.221,102.671 117.221,103.505 ccw(c116.586,103.505) 116.586,104.14 110.236,104.14 ; U11.6 135.222,101.02 133.424,102.817 D4.1 134.675,103.052 135.859,104.236 135.859,104.499 R34.2 137.033,104.775 v1(137.668,104.14)
  Bottom Layer w0.254: v1(115.951,104.14) 117.348,102.743 123.698,102.743 126.873,105.918 129.794,105.918 132.207,103.505 137.033,103.505 v1(137.668,104.14)
CS: Screen1.8 U10.51 | length 44.6
  Top Layer w0.254: Screen1.8 111.478,51.717 109.416,53.779 109.416,60.521 113.007,64.112 120.246,64.112 121.539,65.405 123.698,65.405 124.321,66.028 124.321,68.465 123.032,69.754 U10.51
Iin+: H9.2 R29.1 U6.8 | length 28.9
  Top Layer w0.254: v1(86.36,77.47) 86.36,77.459 R29.1 ; v1(89.281,85.852) 89.281,88.033 U6.8 89.239,88.761 90.551,90.073 90.551,96.901 91.948,98.298 93.353,98.298 H9.2
  Bottom Layer w0.254: v1(86.36,77.47) 86.36,82.931 v1(89.281,85.852)
Iin-: H9.1 U6.1 | length 13.4
  Top Layer w0.254: U6.1 v1(89.239,96.863)
  Bottom Layer w0.254: v1(89.239,96.863) 90.166,97.79 95.385,97.79 H9.1
IL+: H12.1 U5.8 | length 53.6
  Top Layer w0.254: U5.8 104.072,89.848 105.875,91.651 109.886,91.651 112.045,93.81 114.257,93.81 127.254,106.807 142.455,106.807 H12.1
IL-: H12.2 U5.1 | length 54.6
  Top Layer w0.254: U5.1 105.178,93.577 v1(106.045,92.71) ; v1(106.68,90.678) 110.109,90.678 112.395,92.964 114.554,92.964 127.551,105.961 142.07,105.961 145.161,102.87 145.161,101.561 H12.2
  Bottom Layer w0.254: v1(106.045,92.71) 106.045,91.313 v1@106.684,90.674
Iout+: H10.1 U7.8 | length 57.6
  Top Layer w0.254: v1(96.52,86.233) U7.8 ; U7.8@96.52,88.109 U7.8@96.52,88.837
  Bottom Layer w0.254: v1(96.52,86.233) 100.584,86.233 107.315,79.502 107.315,74.803 107.95,74.168 107.95,64.262 109.601,62.611 132.334,62.611 H10.1
Iout-: H10.2 R30.2 U7.1 | length 70
  Top Layer w0.254: v1(96.52,90.043) U7.1 ; R30.2 107.326,76.189 v1(108.204,75.311)
  Bottom Layer w0.254: v1(96.52,90.043) 95.504,89.027 95.504,85.852 96.012,85.344 100.33,85.344 105.791,79.883 v1(105.791,76.2) ; 108.458,75.184 108.839,74.803 108.839,64.643 109.855,63.627 133.858,63.627 H10.2
Key1: K2.3 R19.1 U10.63 | length 38.5
  Top Layer w0.254: R19.1 122.673,50.664 124.206,52.197 127.889,52.197 K2.3@129.609,50.477 ; v1(127.889,60.706) 127.889,61.572 129.921,63.604 129.921,71.374 129.032,72.263 U10.63 ; K2.3 K2.3@129.609,50.477 ; v1(130.81,51.689) 129.609,50.488 K2.3@129.609,50.477
  Bottom Layer w0.254: v1(127.889,60.706) 127.889,54.61 v1(130.81,51.689)
Key2: K3.3 R20.1 U10.64 | length 46.9
  Top Layer w0.254: R20.1 134.468,52.881 K3.3@136.882,50.467 ; v1(129.222,60.706) 129.222,61.912 130.556,63.246 130.556,72.136 129.541,73.151 129.541,76.007 U10.64 ; K3.3 K3.3@136.882,50.467 ; v1(138.176,51.816) 136.882,50.522 K3.3@136.882,50.467
  Bottom Layer w0.254: v1@129.159,60.706 v1(129.222,60.706) 129.286,60.706 v1(138.176,51.816)
Key3: K4.3 R21.1 U10.65 | length 61
  Top Layer w0.254: R21.1 138.615,56.007 K4.3@144.156,50.467 ; U10.65 130.032,73.88 131.191,72.721 131.191,62.778 130.81,62.397 v1(130.81,60.706) ; K4.3@144.156,49.109 K4.3 K4.3@144.156,50.467 ; v1(145.288,51.689) 144.156,50.557 K4.3@144.156,50.467
  Bottom Layer w0.254: v1(130.81,60.706) 136.271,60.706 v1(145.288,51.689)
LEDA: Screen1.1 U10.59 | length 37.2
  Top Layer w0.254: Screen1.1 114.836,55.217 114.265,55.788 114.265,58.131 115.397,59.263 122.509,59.263 123.894,60.648 125.799,60.648 129.171,64.02 129.171,69.203 127.032,71.342 U10.59
LEDB-: LED1.1 U10.62 | length 39.6
  Top Layer w0.254: U10.62 128.532,77.986 v1(129.286,78.74) ; v1(139.121,80.509) 143.011,80.509 147.135,76.385 LED1.1
  Bottom Layer w0.254: v1(129.286,78.74) 131.055,80.509 v1(139.121,80.509)
LEDG-: LED1.5 U10.60 | length 47
  Top Layer w0.254: v1(126.619,78.994) 127.532,78.081 U10.60 ; v1(139.121,82.215) 143.718,82.215 150.335,75.598 LED1.5
  Bottom Layer w0.254: v1(126.619,78.994) 126.619,79.629 129.205,82.215 v1(139.121,82.215)
LEDR-: LED1.3 U10.61 | length 43
  Top Layer w0.254: U10.61 128.032,79.264 v1(128.524,79.756) ; v1(140.208,81.407) 143.383,81.407 148.735,76.055 LED1.3
  Bottom Layer w0.254: v1(128.524,79.756) 130.175,81.407 v1(140.208,81.407)
NetC38_2: C38.2 U10.73 | length 2.6
  Top Layer w0.254: U10.73 134.041,76.007 134.041,74.239 134.297,73.983 134.297,73.933 134.57,73.66 C38.2
NetC40_1: C40.1 U10.48 | length 2.8
  Top Layer w0.254: C40.1 118.999,79.198 119.631,78.566 U10.48
NetLED1_2: LED1.2 R22.1 | length 2.1
  Top Layer w0.254: LED1.2 147.141,54.691 R22.1
NetLED1_4: LED1.4 R23.1 | length 2.1
  Top Layer w0.254: LED1.4 148.739,54.693 R23.1
NetLED1_6: LED1.6 R24.1 | length 2.1
  Top Layer w0.254: R24.1 150.316,54.678 LED1.6
NetR25_1: R25.1 R27.2 U8.2 | length 4.4
  Top Layer w0.254: R25.1 R27.2 89.535,78.983 U8.2
NetR26_1: R26.1 R28.1 U8.6 | length 4.6
  Top Layer w0.254: U8.6 99.831,77.713 R28.1 R26.1
NetR29_2: R29.2 R31.2 U8.3 | length 4.4
  Top Layer w0.254: R31.2 R29.2 89.535,77.713 U8.3
NetR30_1: R30.1 R32.2 U8.5 | length 4.6
  Top Layer w0.254: U8.5 99.831,76.443 R30.1 100.085,74.42 R32.2
NetR34_1: R34.1 SW1.1 | length 14.8
  Top Layer w0.254: v1(132.842,104.775) R34.1
  Bottom Layer w0.254: SW1.1 123.571,106.553 131.064,106.553 v1(132.842,104.775)
NRST: K1.3 R18.1 U10.14 | length 36.7
  Top Layer w0.254: U10.14 128.532,87.876 v1(129.032,87.376) ; v1(140.006,92.456) R18.1 ; v1(147.193,88.646) 147.216,88.669 147.216,90.991 K1.3 K1.3@147.24,91.864
  Bottom Layer w0.254: v1(129.032,87.376) 130.048,86.36 144.907,86.36 v1(147.193,88.646) 143.383,92.456 v1(140.006,92.456)
OSC_IN: C30.1 U10.12 X1.3 | length 4.9
  Top Layer w0.254: U10.12 129.532,93.333 129.472,93.392 129.472,95.793 X1.3
PWMAH: H8.1 U10.39 | length 37.1
  Top Layer w0.254: H8.1 100.203,70.866 112.014,70.866 113.03,71.882 v1(113.03,80.645) ; v1(115.951,82.296) 116.721,83.066 U10.39
  Bottom Layer w0.254: v1(113.03,80.645) 113.03,81.407 113.919,82.296 v1(115.951,82.296)
PWMAL: H8.2 U10.38 | length 35.5
  Top Layer w0.254: H8.2 101.473,69.596 112.522,69.596 114.046,71.12 114.046,81.788 115.824,83.566 U10.38
PWMBH: H13.1 U10.41 | length 20.9
  Top Layer w0.254: H13.1 115.062,67.818 v1(115.062,80.645) ; v1(118.237,81.407) 118.896,82.066 U10.41
  Bottom Layer w0.254: v1@114.911,80.645 v1(115.062,80.645) 117.475,80.645 v1(118.237,81.407)
PWMBL: H13.2 U10.40 | length 20.2
  Top Layer w0.254: H13.2 116.078,68.072 116.078,80.899 117.745,82.566 U10.40
RESET: Screen1.3 U10.56 | length 39
  Top Layer w0.254: Screen1.3 118.689,54.23 114.426,54.23 113.284,55.372 113.284,58.674 114.681,60.071 121.666,60.071 123.19,61.595 125.095,61.595 128.143,64.643 128.143,69.088 125.532,71.699 U10.56
RS: Screen1.4 U10.55 | length 40.2
  Top Layer w0.254: Screen1.4 113.415,53.717 112.268,54.864 112.268,59.055 114.3,61.087 121.285,61.087 122.682,62.484 124.46,62.484 127.127,65.151 127.127,68.961 125.032,71.056 U10.55
SCL: Screen1.6 U10.52 | length 43.1
  Top Layer w0.254: Screen1.6 111.748,52.717 110.363,54.102 110.363,60.071 113.411,63.119 120.65,63.119 122.047,64.516 124.079,64.516 125.222,65.659 125.222,68.707 123.532,70.397 U10.52
SDA: Screen1.5 U10.54 | length 41.4
  Top Layer w0.254: Screen1.5 112.645,53.217 111.379,54.483 111.379,59.563 113.919,62.103 121.031,62.103 122.428,63.5 124.333,63.5 126.111,65.278 126.111,68.834 124.532,70.413 U10.54
SWCLK: H7.1 U10.76 | length 18.6
  Top Layer w0.254: U10.76 137.699,77.566 139.192,76.073 139.192,73.152 140.716,71.628 143.256,71.628 143.764,71.12 143.764,66.556 142.359,65.151 H7.1
SWDIO: H7.2 U10.72 | length 15.3
  Top Layer w0.254: U10.72 133.532,69.922 135.763,67.691 H7.2
USART1_RX: H7.5 U10.69 | length 13
  Top Layer w0.254: U10.69 132.023,76.025 132.023,76.707 132.019,76.712 132.019,77.663 v1(132.715,78.359) ; v1(140.081,75.311) H7.5
  Bottom Layer w0.254: v1(132.715,78.359) 137.033,78.359 v1(140.081,75.311)
USART1_TX: H7.6 U10.68 | length 14.1
  Top Layer w0.254: U10.68 v1(131.532,79.208) ; v1(140.081,77.851) H7.6
  Bottom Layer w0.254: v1(131.532,79.208) 138.724,79.208 v1(140.081,77.851)
Vin-: H9.3 R27.1 | length 30.9
  Top Layer w0.254: v1(83.947,96.012) 83.947,81.28 85.99,79.237 R27.1
  Bottom Layer w0.254: v1(83.947,96.012) 83.947,97.282 85.113,98.448 89.939,98.448 91.775,100.284 92.799,100.284 H9.3
Vout-: H10.3 R28.2 | length 49.7
  Top Layer w0.254: R28.2 106.818,77.967 v1(108.204,76.581)
  Bottom Layer w0.254: v1(108.204,76.581) 109.728,75.057 109.728,65.011 110.223,64.516 136.779,64.516 138.049,63.246 H10.3
Vref+: C26.2 C34.1 C35.2 C36.2 C37.1 U5.3 U6.3 U7.3 U9.2 U10.20 | length 64.2
  Top Layer w0.254: U6.3 86.635,93.641 86.635,94.547 85.797,95.385 85.797,95.769 C35.2 85.471,96.095 85.471,97.209 87.567,99.306 U9.2 87.651,99.642 C37.1 ; v1(91.567,96.012) 91.585,95.994 C36.2 ; U7.3@93.98,93.653 93.98,94.382 93.103,95.259 93.103,95.721 C36.2 ; C34.1 C34.1@100.381,96.038 ; C34.1@100.397,95.988 100.655,95.731 100.655,95.365 101.4,94.62 101.4,94.529 101.532,94.396 U5.3 ; v1@107.379,93.789 103.886,97.282 100.838,97.282 100.381,96.825 C34.1@100.381,96.038 ; U10.20 125.532,92.826 124.566,93.792 C26.2 124.577,93.853 v1(126.111,93.853) ; C36.2 93.074,96.238 93.074,96.63 93.599,97.155 99.215,97.155 100.058,96.311 100.108,96.311 C34.1@100.381,96.038
  Bottom Layer w0.254: v1(85.725,97.536) 87.249,96.012 v1(91.567,96.012) ; v1@107.569,93.853 v1(126.111,93.853)
  other v1: 107.442,93.853
pads on no net: CN6.3 CN6.4 CN7.3 CN7.4 CN8.3 CN8.4 K1.2 K1.4 K2.2 K2.4 K3.2 K3.4 K4.2 K4.4 Screen1.0 U5.4 U6.4 U7.4 U10.1 U10.2 U10.3 U10.4 U10.5 U10.7 U10.8 U10.9 U10.13 U10.17 U10.22 U10.23 U10.28 U10.29 U10.30 U10.31 U10.32 U10.33 U10.34 U10.35 U10.36 U10.37 U10.42 U10.43 U10.44 U10.45 U10.46 U10.47 U10.53 U10.57 U10.58 U10.66 U10.67 U10.70 U10.71 U10.77 U10.78 U10.79 U10.80 U10.81 U10.82 U10.83 U10.84 U10.85 U10.86 U10.87 U10.88 U10.89 U10.90 U10.91 U10.92 U10.93 U10.97 U10.98 U11.5 X1.1

## Polygon pours and split planes (outlines as drawn)
AGND on Bottom Layer "AGND_L02_P000" (solid, remove dead copper, pour order 0): 82.423,107.061 82.423,49.53 ccw(c84.963,49.53) 84.963,46.99 149.479,46.99 ccw(c149.479,49.53) 152.019,49.53 152.019,107.061

## Silkscreen, mask and mechanical layers (free items; w line width, h text height)
Top Overlay:
  lines w0.254: 83.185,68.453 83.185,70.993 ; 92.857,100.342 97.937,100.342 ; 96.52,67.183 104.14,67.183 ; 114.427,67.183 122.047,67.183 ; 132.969,61.976 138.049,61.976 ; 146.943,99.779 146.943,102.319 ; 84.318,46.736 112.268,46.736 112.268,60.236 84.318,60.236 84.318,46.736
  text "<" at 126.873,47.625 h1.52
  text "ok" at 133.604,47.625 h1.52
  text ">" at 141.732,47.625 h1.52
Bottom Overlay:
  lines w0.254: 81.661,60.452 152.781,60.452
  text "H" at 100.711,105.537 h1.52
  text "L" at 105.918,105.537 h1.52
  text "H" at 107.569,105.537 h1.52
  text "L" at 112.649,105.537 h1.52
  text "H" at 114.554,105.537 h1.52
  text "L" at 119.634,105.537 h1.52
  text "RESET" at 150.622,89.916 h1.52 r90
  text "TX" at 152.019,76.962 h1.52
  text "RX" at 151.892,74.549 h1.52
  text "5V" at 151.765,72.136 h1.52
  text "GND" at 151.892,69.596 h1.52
  text "DIO" at 151.892,66.929 h1.52
  text "CLK" at 151.892,64.516 h1.52
Mechanical 1:
  the board outline again, w0.254

## Text inside footprints (layer, text, board x,y; h text height)
SW1: Top Overlay "ON" at 127,105.41 h1.52 r270